# Altium PCB RelayBoardV1.3.PcbDoc
Units mil, origin at the board's own origin, x right, y up, seen from the top; angles counter-clockwise.
Board outline 3700.79 x 5244.09 mil, 2 copper layers (Top Layer, Bottom Layer); 36 components, 39 nets, 112 pads, 1912 vias.
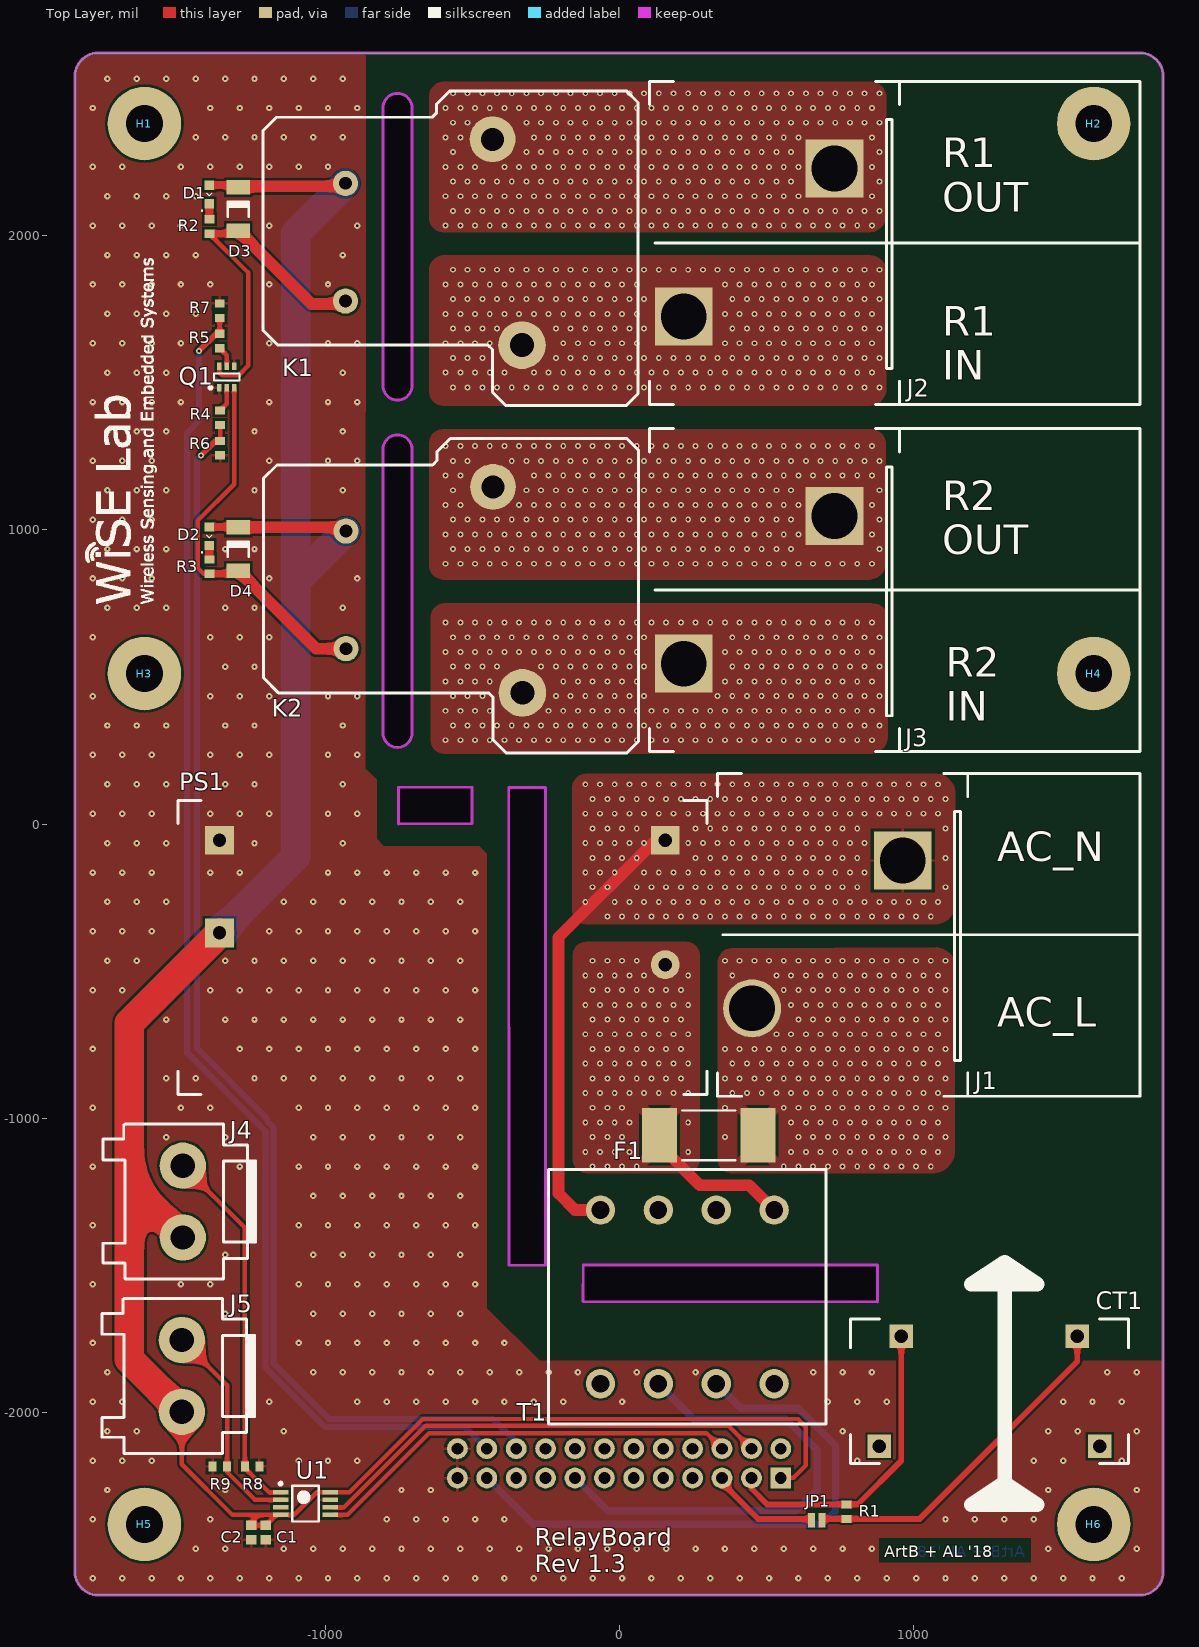
[diagram p0: Top Layer view]
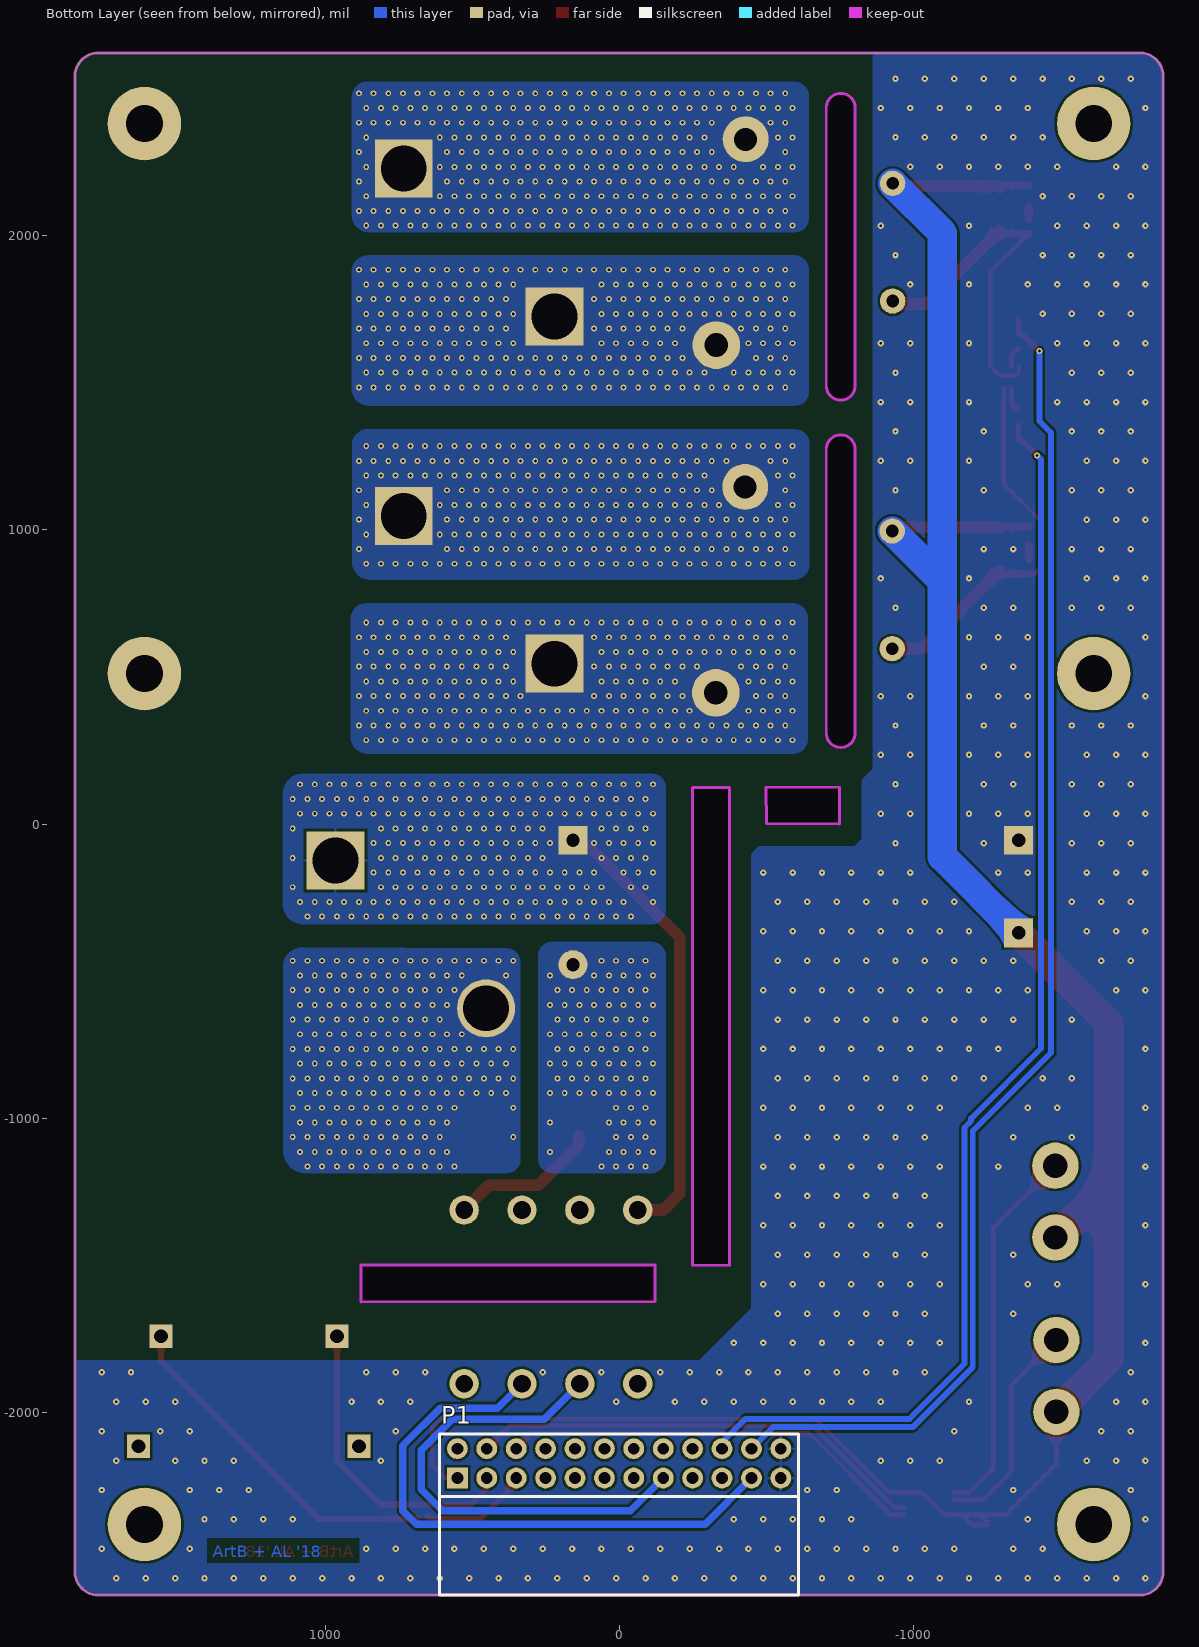
[diagram p1: Bottom Layer view, seen from below]

## Layer stack, top to bottom
Top Solder: solder mask 0.4, Solder Resist, Dk 3.5
Top Layer: signal copper 1.4
Dielectric 1: dielectric 12.6, FR-4, Dk 4.8
Bottom Layer: signal copper 1.4
Bottom Solder: solder mask 0.4, Solder Resist, Dk 3.5

## Board outline
-688.98,2622.05 688.98,2622.05 1771.65,2622.05 cw(c1771.65,2543.31) 1850.39,2543.31 1850.39,-2543.31 cw(c1771.65,-2543.31) 1771.65,-2622.05 -1771.65,-2622.05 cw(c-1771.65,-2543.31) -1850.39,-2543.31 -1850.39,2543.31 cw(c-1771.65,2543.31) -1771.65,2622.05
cut-out: -802.89,1490.75 -802.89,2435.63 cw(c-753.68,2435.63) -753.67,2484.85 cw(c-753.67,2435.63) -704.46,2435.63 -704.46,1490.75 cw(c-753.67,1490.75) -753.67,1441.54 cw(c-753.67,1490.75)
cut-out: -753.67,1323.43 ccw(c-753.67,1274.22) -802.89,1274.22 -802.89,309.65 ccw(c-753.67,309.65) -753.67,260.44 ccw(c-753.67,309.65) -704.46,309.65 -704.46,1274.22 ccw(c-753.67,1274.22)
cut-out: -121.88,-1500.54 -122.69,-1624.07 878.12,-1624.91 878.09,-1499.93
cut-out: -250.13,124.57 -375.34,124.31 -374.93,-1500.69 -249.98,-1500.69
cut-out: -500,125 -750,125 -750,0 -500.6,1.18

## Design rules (kind name [scope] priority, off if disabled: settings)
Clearance "Clearance - Ignore Keepout" [IsKeepOut] p1: gap=0 ignorepadtopadclearanceinfootprint=FALSE
Clearance [All] p2: gap=8 ignorepadtopadclearanceinfootprint=FALSE
ComponentClearance "Ignore Enclosure Part" [InComponent('H1')] p1: gap=0 collisioncheckmode=3 verticalgap=0 showdistances=FALSE
HoleSize [All] p1: absolutevalues=TRUE maxlimit=200 minlimit=8 maxpercent=80.000 minpercent=20.000
HoleToHoleClearance [All] p1: gap=12 allowstackedmicrovias=TRUE
MinimumSolderMaskSliver MinimumSolderMaskSliver_jumpers [HasFootprint('PAD-JUMPER-2-NO_NO_SILK')] p1: minsoldermaskwidth=2
MinimumSolderMaskSliver [All] p2: minsoldermaskwidth=4
PolygonConnect PolygonConnect_Vias [IsStitchingVia] p1: connectstyle=Direct reliefconductorwidth=10 reliefentries=4 polygonreliefangle="90 Angle" airgapwidth=10
PolygonConnect PolygonConnect_PS1 [HasFootprint('IRM-10-5')] p2: connectstyle=Direct reliefconductorwidth=40 reliefentries=4 polygonreliefangle="45 Angle" airgapwidth=10
PolygonConnect PolygonConnect_fUSE [HasFootprint('FUSE M10742X40L Schurter UMK 250 Series')] p3: connectstyle=Relief reliefconductorwidth=40 reliefentries=4 polygonreliefangle="45 Angle" airgapwidth=10
PolygonConnect PolygonConnect_HV [InNet('NEtF1_1') OR InNet('NetF1_2') OR InNet('NetJ1_2')  OR InNet('NetJ3_1')  OR InNet('NetJ3_2')  OR InNet('NetJ2_1')   OR InNet('NetJ2_2')] p4: connectstyle=Direct reliefconductorwidth=10 reliefentries=4 polygonreliefangle="90 Angle" airgapwidth=10
PolygonConnect [All] p5: connectstyle=Relief reliefconductorwidth=10 reliefentries=4 polygonreliefangle="90 Angle" airgapwidth=10
RoomDefinition RelayBoard [InComponentClass('RelayBoard')] p1: confinementstyle=ConfineIn formatcopy=TRUE lockcomponents=FALSE outline -2890,-4265 -890,-4265 -890,-3265 -2890,-3265
RoutingVias [All] p1: holewidth=28 width=50 viastyle="Through Hole" minholewidth=10 minwidth=20 maxholewidth=28 maxwidth=50
SilkToSilkClearance [All] p1: silktosilkclearance=8
SilkToSolderMaskClearance [IsPad] p1: minsilkscreentomaskgap=2 clearancetoexposedcopper=TRUE
SolderMaskExpansion [All] p1: expansion=4
Width [All] p1: maxlimit=500 minlimit=8 preferedwidth=25
24 further rules are at their usual default settings.

## Classes and differential pairs
polygon class PolygonClass_1: NETJ2_2_L01_P032
polygon class PolygonClass_2: NETJ2_2_L01_P032 NETJ2_2_L02_P060

## Components (designator, comment, footprint, x,y, rotation, side; value= is the part's Value field where it differs from the comment)
C1 "4.7uF" "CAPC1608X09L - CAP0603" -1201.5,-2409.81 r90 top
C2 "0.1uF" "CAPC1608X09L - CAP0603" -1250.75,-2409.81 r90 top
CT1 "Current Transformer" CT-CR8348 959.57,-1742.01 r0 top locked
D1 "Led Red" "LED-0603 .7MM TALL" -1393.44,2141.11 r90 top
D2 "Led Red" "LED-0603 .7MM TALL" -1393.44,978.94 r90 top
D3 "Diode" "SOD-80  MiniMELF" -1295.01,2091.14 r270 top
D4 "Diode" "SOD-80  MiniMELF" -1295.01,934.65 r270 top
F1 "Fuse 500mA" "FUSE M10742X40L Schurter UMK 250 Series" 304.7,-1058.69 r180 top
H1 "1/8in Hole by 1/4in Ring Fastener" "1/8in Fastener Hole"#1 -1614.17,2381.89 r0 top
H2 "1/8in Hole by 1/4in Ring Fastener" "1/8in Fastener Hole"#1 1614.17,2381.89 r0 top
H3 "1/8in Hole by 1/4in Ring Fastener" "1/8in Fastener Hole"#2 -1415.44,819.2 r0 top
H4 "1/8in Hole by 1/4in Ring Fastener" "1/8in Fastener Hole"#3 1409.91,829.91 r0 top
H5 "1/8in Hole by 1/4in Ring Fastener" "1/8in Fastener Hole"#4 -193.77,-1148.49 r0 top
H6 "1/8in Hole by 1/4in Ring Fastener" "1/8in Fastener Hole"#1 1614.17,-2381.89 r0 top
J1 "High Voltage Connector" "2POS Barrier Block Terminal"#1 452.22,-626.82 r90 top locked
J2 "High Voltage Connector" "2POS Barrier Block Terminal"#2 220.03,1726.34 r90 top locked
J3 "High Voltage Connector" "2POS Barrier Block Terminal"#2 220.03,545.23 r90 top locked
J4 "Thrmistor Connector" "2POS JST B02P-VL" -1483.78,-1284.13 r270 top locked
J5 "Thrmistor Connector" "2POS JST B02P-VL" -1487.04,-1876.99 r270 top locked
JP1 "JUMPER-PAD-2-NO" PAD-JUMPER-2-NO_NO_SILK 672.2,-2367.61 r0 top
K1 "Power Relay" T9AS1D12-5 -655.45,1953.55 r270 top locked
K2 "Power Relay" T9AS1D12-5 -653.87,771.26 r270 top locked
P1 "0.1\" Pitch, 2 Row, 24 Pos, Female, Right-Angle" "0.1 INCH 2 ROW 24 POS FEMALE RIGHT-ANGLE HEADER SULLINS" 0,-2174.41 r180 bottom locked
PS1 "AC/DC Power Supply" IRM-10-5 298.68,-919.49 r180 top
Q1 "NPN MOSFET" "SC-70-6  (SOT-363)" -1334.38,1520.28 r90 top
R1 "VAL?" "RESC1608X06L - RES0603" 773.45,-2338.6 r90 top
R2 "150" "RESC1608X06L - RES0603" -1393.44,2032.09 r90 top
R3 "150" "RESC1608X06L - RES0603" -1393.44,875.59 r90 top
R4 "1K" "RESC1608X06L - RES0603" -1357.09,1381.89 r90 top
R5 "1K" "RESC1608X06L - RES0603" -1358.13,1642.65 r270 top
R6 "10K" "RESC1608X06L - RES0603" -1357.09,1278.54 r90 top
R7 "10K" "RESC1608X06L - RES0603" -1358.13,1746 r270 top
R8 "10K" "RESC1608X06L - RES0603" -1248.06,-2184.7 r180 top
R9 "10K" "RESC1608X06L - RES0603" -1357.95,-2185.1 r0 top
T1 "SPK00304" SPK003 231.92,-1608.12 r180 top
U1 "ADC" "8L UMAX/USOP TSOP65P490X110-8L" -1066.65,-2311.17 r0 top

## Footprints (in the part's own frame and the unit in brackets; to place one, negate y for a bottom-side part, rotate by r counter-clockwise, add the part's x,y. Pads: shape width x height; smd on the part's side, far side on the other; paste and mask are expansions set on the pad)
"0.1 INCH 2 ROW 24 POS FEMALE RIGHT-ANGLE HEADER SULLINS" [mm] "Sullins 0.1\" Dual row 24 position female right-angle header"
  rect 1.8x1.8 hole 1.02: 1(-13.97,-1.27)
  round 1.8 hole 1.02: 2(-13.97,1.27) 3(-11.43,-1.27) 4(-11.43,1.27) 5(-8.89,-1.27) 6(-8.89,1.27) 7(-6.35,-1.27) 8(-6.35,1.27) 9(-3.81,-1.27) 10(-3.81,1.27) 11(-1.27,-1.27) 12(-1.27,1.27) 13(1.27,-1.27) 14(1.27,1.27) 15(3.81,-1.27) 16(3.81,1.27) 17(6.35,-1.27) 18(6.35,1.27) 19(8.89,-1.27) 20(8.89,1.27) 21(11.43,-1.27) 22(11.43,1.27) 23(13.97,-1.27) 24(13.97,1.27)
  silkscreen extent -15.5,-11.37 15.5,2.54, body extent -15.49,-11.34 15.49,1.5, height 5.08
"1/8in Fastener Hole"#1 [mil]
  round 250 hole 125: 1(0,0)
"1/8in Fastener Hole"#2 [mil]
  round 250 hole 125: 1(-198.73,-307.39)
"1/8in Fastener Hole"#3 [mil]
  round 250 hole 125: 1(204.27,-318.1)
"1/8in Fastener Hole"#4 [mil]
  round 250 hole 125: 1(-1420.4,-1233.4)
"2POS Barrier Block Terminal"#1 [mm] "CONN BARRIER STRIP 2CIRC 0.5\""
  round 5 hole 3.96: 1(0,0)
  rect 5x5 hole 3.96: 2(12.766,-13.018)
  silkscreen extent -7.6,-18.63 20.3,2.97, body extent -7.64,-18.62 20.3,2.97, height 22.61
"2POS Barrier Block Terminal"#2 [mm] "CONN BARRIER STRIP 2CIRC 0.5\""
  rect 5x5 hole 3.96: 1(0,0) 2(12.766,-13.018)
  silkscreen extent -7.6,-18.63 20.3,2.97, body extent -7.64,-18.62 20.3,2.97, height 22.61
"2POS JST B02P-VL" [mm] "CONN HEADER 2POS VL SERIES TIN"
  round 4 hole 2.1: 1(-3.1,0) 2(3.1,0)
  silkscreen extent -6.7,-6.9 6.7,6.3, body extent -6.7,-6.9 6.7,6.3, height 16.4
"8L UMAX/USOP TSOP65P490X110-8L" [mm] "TSOP, 8-Leads, Body 3.00x3.00mm, Pitch 0.65mm, IPC High Density"
  rect 1.35x0.4 smd mask+0.051: 1(-2.15,0.975) 2(-2.15,0.325) 3(-2.15,-0.325) 4(-2.15,-0.975) 5(2.15,-0.975) 6(2.15,-0.325) 7(2.15,0.325) 8(2.15,0.975)
  silkscreen extent -2.27,-1.55 1.15,1.85, body extent -2.51,-1.55 2.52,1.55, height 1.09
"CAPC1608X09L - CAP0603" [mm] "Chip Capacitor, 2-Leads, Body 1.60x0.80mm, IPC High Density"
  rect 0.8x0.9 smd: 1(-0.625,0) 2(0.625,0)
  body extent -0.87,-0.48 0.87,0.48, height 0.9
CT-CR8348 [mm] "TRANSF CURRENT .27\" OPENING PCB CR8348-2000"
  rect 2x2 hole 1.2: 1(0,0) 2(15.2,0) ""(-1.9,-9.5) ""(17.15,-9.5)
  silkscreen extent -4.38,-11 19.62,1.5, body extent -4.37,-10.1 19.62,0.6, height 25
"FUSE M10742X40L Schurter UMK 250 Series" [mm] "Molded Capacitor, 2-Leads, Body 10.70x4.20mm, IPC High Density"
  rect 3x4.7 smd: 1(-4.25,0) 2(4.25,0)
  silkscreen extent -2.29,-2.15 2.29,2.15, body extent -5.65,-2.11 5.65,2.09, height 3.97
IRM-10-5 [mm] "AC/DC Power Modules 5V 2A 10W 85-264Vin Encap PS"
  round 2.5 hole 1.15: AC1(3.6,-11.2)
  rect 2.5x2.5 hole 1.15: AC2(3.6,-21.95) V+(42.1,-13.95) V-(42.1,-21.95)
  silkscreen extent 0,-25.4 45.7,0, body extent 0,-25.4 45.7,0, height 21.5
"LED-0603 .7MM TALL" [mm] "Chip Diode, 2-Leads, Body 1.60x0.80mm, IPC High Density"
  rect 0.8x0.8 smd: A(0.8,0) K(-0.8,0)
  silkscreen extent -1.45,-0.25 0.13,0.68, body extent -1.01,-0.54 1.01,0.53, height 0.6
PAD-JUMPER-2-NO_NO_SILK [mil]
  rect 25x50 smd: 1(-17.72,0) 2(17.72,0)
"RESC1608X06L - RES0603" [mm] "Chip Resistor, 2-Leads, Body 1.60x0.80mm, IPC High Density"
  rect 0.7x0.85 smd: 1(-0.625,0) 2(0.625,0)
  body extent -0.87,-0.48 0.87,0.48, height 0.55
"SC-70-6  (SOT-363)" [mm] "TSOP, 6-Leads, Body 2.00x1.25mm, Pitch 0.65mm, IPC High Density"
  rect 0.648x0.406 smd mask+0.051: 1(-0.919,0.65) 2(-0.919,0) 3(-0.919,-0.65) 4(0.919,-0.65) 5(0.919,0) 6(0.919,0.65)
  silkscreen extent -1.04,-1.1 0.3,1.53, body extent -1.05,-1.1 1.05,1.1, height 1
"SOD-80  MiniMELF" [mm] "MELF Diode, 2-Leads, Body 3.50x1.50mm, IPC High Density"
  rect 1.25x2 smd: 1(-1.875,0) 2(1.875,0)
  silkscreen extent -0.65,-0.9 0.65,0.9, body extent -1.75,-0.75 1.75,0.75, height 1.5
SPK003 [mm]
  round 2.54 hole 1.524: 1(-7.5,-7.5) 2(-2.5,-7.5) 3(2.5,-7.5) 4(7.5,-7.5) 5(-7.5,7.5) 6(-2.5,7.5) 7(2.5,7.5) 8(7.5,7.5)
  silkscreen extent -12,-11 12,11, body extent -12,-11 12,11, height 15
T9AS1D12-5 [mil] "RELAY GEN PURPOSE SPST 30A 5V"
  round 162 hole 81: 1(325,325)
  round 156 hole 78: 2(-375,225)
  round 86 hole 43: 3(175,-275) 4(-225,-275)
  silkscreen extent -540,-555 530,720, body extent -545,-555 535,725, height 806

## Part data
C1: library part "CAP0603 4.7uF 10% 6.3V X7R", "SMT 0603 Ceramic Capacitor", Supplier Part Number 1=1276-2087-1-ND, TempCoeff=X7R, Tolerance=10%, Voltage=6.3V, Supplier 1=Digi-Key
C2: library part "CAP0603 0.1uF 10% 25V X7R", "SMT 0603 Ceramic Capacitor", Supplier Part Number 1=311-1341-1-ND, TempCoeff=X7R, Tolerance=10%, Voltage=25V, Supplier 1=Digi-Key, Supplier 2=Digi-Key, Supplier Part Number 2=490-1524-1-ND
CT1: library part "CT CR8348-2000", "TRANSF CURRENT .27\" OPENING PCB 50A", Supplier Part Number 1=582-1010-ND, Supplier 1=Digi-Key, url=https://www.digikey.com/product-detail/en/cr-magnetics-inc/CR8348-2000/582-1010-ND/1045166
D1 D2: library part "LED0603 RED 20mA 250mcd", "LED RED CLEAR 0603 SMD 250 mcd", Supplier Part Number 1=732-4978-1-ND, Supplier 1=Digi-Key
D3 D4: library part "Diode LL4150GS18", "DIODE GEN 50V 600MA MINI MELF", Supplier Part Number 1=LL4150GS18GICT-ND, Supplier 1=Digi-Key
F1: library part FUSE-Schurter-3404.2463.22, "FUSE UMK 250 FUSE WITH HOLDER 500MA F", Supplier Part Number 1=486-3187-1-ND, Supplier 1=Digi-Key, url=https://www.digikey.com/product-detail/en/3404.2463.22/486-3187-1-ND/5225261?curr=usd&WT.z_cid=ref_octopart_dkc_buynow&site=us
H1 H2 H3 H4 H5 H6: library part "1/8in by 1/4in Fastner Hole"
J1 J2 J3: library part "2POS CONN BARRIER STRIP 2CIRC 0.5\" 45A 600V", "MOLEX  0386608802", Supplier Part Number 1=WM4395-ND, Supplier 1=Digi-Key, url=http://www.mouser.com/ProductDetail/Molex/38660-8802/?qs=sGAEpiMZZMsntO7gZZwOWBznzzIjRi3IH61qEmgvOKA%3d
J4 J5: library part "2POS Thermistor Connector B02P-VL", "JST B02P-VL CONN HEADER 2POS VL SERIES TIN", Supplier Part Number 1=455-2361-ND, Supplier 1=Digi-Key, url=https://www.digikey.com/products/en?mpart=B02P-VL&v=455
K1 K2: library part T9AS1D12-5, "Single-Pole Single-Throw Relay", Supplier Part Number 1=PB1014-ND, Part Number=T9AS1D12-5, Supplier 1=Digi-Key
P1: library part "0.1\" 2 row 24 position female right-angle header sullins", "Sullins 0.1\" 2 row 24 position female right-angle header", Supplier Part Number 1=S5526-ND, Pitch=2.54mm, Positions=24, Rows=2, Supplier 1=Digi-Key, Supplier 2=Digi-Key, Supplier Part Number 2=S5565-ND
PS1: library part IRM-10-5, "AC/DC Power Modules 5V 2A 10W 85-264Vin Encap PS", Supplier Part Number 1=70387823, Mouser Link=http://www.mouser.com/ProductDetail/Mean-Well/IRM-10-5/?qs=sGAEpiMZZMuWiaalG5TUgH52QN1%252bIKAVGLeN4i9HrWU2QI8q%2fOO4Cw%3d%3d, Supplier 1=Allied, Supplier 2=Mouser, Supplier Part Number 2="Anonymous Daily Limit Reached"
Q1: library part SI1922EDH-T1-GE3CT, "2N-CH NPN MOSFET 20V 1.3A SOT-363", Supplier Part Number 1=SI1922EDH-T1-GE3CT-ND, Supplier 1=Digi-Key
R1: library part RES0603, "SMT 0603 Ceramic Resistor"
R2 R3: library part "RES0603 150 1% 1/10W_1", "SMT 0603 Ceramic Resistor", Supplier Part Number 1=311-150HRCT-ND, Supplier 1=Digi-Key
R4 R5: library part "RES0603 1K 1% 1/10W", "SMT 0603 Ceramic Resistor", Power=1/10W, Supplier Part Number 1=311-1.00KHRCT-ND, Tolerance=1%, Supplier 1=Digi-Key, Supplier 2=Digi-Key, Supplier 3=Digi-Key, Supplier Part Number 2=P1.00KHCT-ND, Supplier Part Number 3=RMCF0603FG1K00CT-ND
R6 R7 R8 R9: library part "RES0603 10K 1% 1/10W", "SMT 0603 Ceramic Resistor", Power=1/10W, Supplier Part Number 1=311-10.0KHRCT-ND, Tolerance=1%, Supplier 1=Digi-Key, Supplier 2=Digi-Key, Supplier 3=Digi-Key, Supplier Part Number 2=RMCF0603FT10K0CT-ND, Supplier Part Number 3=P10.0KHCT-ND
T1: "Standard PCB-Transformers"
U1: library part MAX11612EUA+, "IC ADC I2C/SRL 12BIT 4CH 8UMAX", Supplier Part Number 1=MAX11612EUA+-ND, Supplier 1=Digi-Key, url=https://www.digikey.com/product-detail/en/maxim-integrated/MAX11612EUA-/MAX11612EUA--ND/2061925

## Via types
v1: diameter 20, hole 10, Top Layer to Bottom Layer, tented both sides, 1465 vias
v2: diameter 22, hole 8, Top Layer to Bottom Layer, tented both sides, 447 vias

## Nets (pads, with @x,y where several pads share a name; then routed paths per layer and width w, separated by ;. In a path a pad name is that pad's centre, name@x,y a point inside that pad or via, vN(x,y) a via of type N, cw(c..) or ccw(c..) an arc to the next point about the centre after c; other vN are vias at no path point)
3.3V: P1.2
5V: C1.2 C2.2 D1.A D2.A D3.1 D4.1 J4.2 J5.2 K1.4 K2.4 P1.1 PS1.V+ U1.4 U1.8 | length 8930.9
  Top Layer w10: D4.1@-1296.69,1010.66 -1296.98,1010.44 D4.1@-1277.3,1010.44
  Top Layer w15: J5.2 -1487.04,-2177.53 -1314.9,-2349.67 -1226.83,-2349.67 ; U1.4@-1151.3,-2349.67 -1138.75,-2349.67 -1138.75,-2349.45 -1104.93,-2349.45 -1028.38,-2272.9 U1.8@-969.46,-2272.9 ; U1.8 -917.09,-2272.79 -667.78,-2023.48 608.74,-2023.48 635.02,-2049.76 635.02,-2181.49 593.43,-2223.08 551.33,-2223.08 P1.1 ; -1226.83,-2349.67 -1250.75,-2373.59 C2.2 C1.2 U1.4@-1165.96,-2349.67 ; -1226.83,-2349.67 U1.4@-1165.96,-2349.67 ; U1.4@-1165.96,-2349.67 -1151.41,-2349.67 U1.4 -1165.85,-2349.56 U1.4@-1165.96,-2349.67
  Top Layer w25: D2.A D4.1@-1296.98,1010.44 ; D1.A -1302.65,2172.6 D3.1
  Top Layer w40: D4.1 -1295.01,1008.98 -941.59,1008.98 K2.4 ; D3.1 -1291.27,2168.7 K1.4@-930.45,2168.7
  Top Layer w100: J5.2 -1665.3,-1820.77 -1665.3,-1224.66 ; J4.2 -1665.3,-1224.66 ; PS1.V+ -1665.3,-676.78 -1665.3,-1224.66
  Bottom Layer w100: PS1.V+ -1099.44,-110.91 -1099.44,834.71 ; K1.4 -1099.44,2009.56 -1099.44,834.71 ; K2.4 -1090.43,834.71 -1099.44,834.71
60HzAnt: P1.21 T1.6 | length 1984.1
  Bottom Layer w25: P1.21 -292.52,-2381.89 688.98,-2381.89 735.72,-2335.15 735.72,-2113.89 608.34,-1986.51 413.46,-1986.51 T1.6
60HzAntRef: P1.15 T1.7 | length 1666.7
  Bottom Layer w25: P1.15 -38.71,-2335.7 600.79,-2335.7 673.41,-2263.09 673.41,-2129.6 567.69,-2023.89 253.99,-2023.89 T1.7
AC_L: F1.2 PS1.AC1 T1.1 | length 514.1
  Top Layer w40: F1.2 137.37,-1091.09 274.53,-1228.24 442.6,-1228.24 T1.1
  other v1: -90,-1165 -40,-1165 10,-1165 60,-1165 -115,-1115 -65,-1115 -15,-1115 35,-1115 235,-1115 -90,-1065 -40,-1065 10,-1065 -115,-1015 -65,-1015 -15,-1015 35,-1015 235,-1015 -90,-965 -40,-965 10,-965 -115,-915 -65,-915 -15,-915 35,-915 85,-915 135,-915 185,-915 235,-915 -90,-865 -40,-865 10,-865 60,-865 110,-865 160,-865 210,-865 -115,-815 -65,-815 -15,-815 35,-815 85,-815 135,-815 185,-815 235,-815 -90,-765 -40,-765 10,-765 60,-765 110,-765 160,-765 210,-765 -115,-715 -65,-715 -15,-715 35,-715 85,-715 135,-715 185,-715 235,-715 -90,-665 -40,-665 10,-665 60,-665 110,-665 160,-665 210,-665 -115,-615 -65,-615 -15,-615 35,-615 85,-615 135,-615 185,-615 235,-615 -90,-565 -40,-565 10,-565 60,-565 110,-565 160,-565 210,-565 -115,-515 -65,-515 -15,-515 35,-515 85,-515 235,-515 -90,-465 -40,-465 10,-465 60,-465
AC_N: J1.2 PS1.AC2 T1.4 | length 1536.8
  Top Layer w40: T1.4 -149.58,-1312.84 -206.14,-1256.28 -206.14,-385.6 124.14,-55.32 PS1.AC2
  other v1: -40,-315 10,-315 60,-315 110,-315 160,-315 210,-315 260,-315 310,-315 360,-315 410,-315 460,-315 510,-315 560,-315 610,-315 660,-315 710,-315 760,-315 810,-315 860,-315 910,-315 960,-315 1010,-315 1060,-315 -115,-265 -15,-265 35,-265 85,-265 135,-265 185,-265 235,-265 285,-265 335,-265 385,-265 435,-265 485,-265 535,-265 585,-265 635,-265 685,-265 735,-265 785,-265 835,-265 885,-265 935,-265 985,-265 1035,-265 1085,-265 -90,-215 -40,-215 60,-215 110,-215 160,-215 210,-215 260,-215 310,-215 360,-215 410,-215 460,-215 510,-215 560,-215 610,-215 660,-215 710,-215 760,-215 810,-215 1110,-215 -115,-165 -65,-165 -15,-165 85,-165 135,-165 185,-165 235,-165 285,-165 335,-165 385,-165 435,-165 485,-165 535,-165 585,-165 635,-165 685,-165 735,-165 785,-165 835,-165 -90,-115 -40,-115 10,-115 60,-115 260,-115 310,-115 360,-115 410,-115 460,-115 510,-115 560,-115 610,-115 660,-115 710,-115 760,-115 810,-115 1110,-115 -115,-65 -65,-65 -15,-65 35,-65 85,-65 235,-65 285,-65 335,-65 385,-65 435,-65 485,-65 535,-65 585,-65 635,-65 685,-65 735,-65 785,-65 835,-65 -90,-15 -40,-15 10,-15 60,-15 260,-15 310,-15 360,-15 410,-15 460,-15 510,-15 560,-15 610,-15 660,-15 710,-15 760,-15 810,-15 1110,-15 -115,35 -65,35 -15,35 35,35 85,35 135,35 185,35 235,35 285,35 335,35 385,35 435,35 485,35 535,35 585,35 635,35 685,35 735,35 785,35 835,35 885,35 935,35 985,35 1035,35 1085,35 -90,85 -40,85 10,85 60,85 110,85 160,85 210,85 260,85 310,85 360,85 410,85 460,85 510,85 560,85 610,85 660,85 710,85 760,85 810,85 860,85 910,85 960,85 1010,85 1060,85 1110,85 -115,135 -65,135 -15,135 35,135 85,135 135,135 185,135 235,135 285,135 335,135 385,135 435,135 485,135 535,135 585,135 635,135 685,135 735,135 785,135 835,135 885,135 935,135 985,135 1035,135 1085,135
AIN0: J4.1 R8.2 U1.1 | length 1284
  Top Layer w15: J4.1 -1272.66,-1373.21 R8.2 -1272.66,-2190.74 -1190.51,-2272.9 U1.1@-1138.75,-2272.9
AIN1: J5.1 R9.2 U1.2 | length 746.3
  Top Layer w15: J5.1 -1333.34,-1908.64 R9.2 -1333.34,-2203.77 -1238.62,-2298.49 U1.2@-1138.75,-2298.49
CT_N: JP1.1 P1.5 | length 375.5
  Top Layer w20: P1.5 350,-2240.57 473.3,-2363.87 643.2,-2363.87 JP1.1@653.86,-2353.21
CT_P: CT1.1 P1.3 R1.2 | length 1052.6
  Top Layer w20: P1.3 450,-2260.14 503.86,-2313.99 R1.2 811.04,-2313.99 959.57,-2165.46 CT1.1
GND: C1.1 C2.1 P1.23 P1.24 PS1.V- Q1.1 Q1.4 R6.1 R7.1 R8.1 R9.1 U1.7
  other v2: -1790,-2565 -1690,-2565 -1590,-2565 -1490,-2565 -1390,-2565 -1290,-2565 -1190,-2565 -1090,-2565 -990,-2565 -890,-2565 -790,-2565 -690,-2565 -590,-2565 -490,-2565 -390,-2565 -290,-2565 -190,-2565 -90,-2565 10,-2565 110,-2565 210,-2565 310,-2565 410,-2565 510,-2565 610,-2565 710,-2565 810,-2565 910,-2565 1010,-2565 1110,-2565 1210,-2565 1310,-2565 1410,-2565 1510,-2565 1610,-2565 1710,-2565 -1440,-2465 -1340,-2465 -1140,-2465 -1040,-2465 -940,-2465 -840,-2465 -740,-2465 -640,-2465 -540,-2465 -440,-2465 -340,-2465 -240,-2465 -140,-2465 -40,-2465 60,-2465 160,-2465 260,-2465 360,-2465 460,-2465 560,-2465 660,-2465 760,-2465 860,-2465 1460,-2465 1760,-2465 -1790,-2365 -1390,-2365 -790,-2365 -690,-2365 -590,-2365 -490,-2365 -390,-2365 1110,-2365 1210,-2365 1310,-2365 1410,-2365 -1740,-2265 -1340,-2265 -740,-2265 -640,-2265 1260,-2265 1360,-2265 1460,-2265 1760,-2265 -1790,-2165 -1690,-2165 -1590,-2165 -1090,-2165 -990,-2165 -890,-2165 810,-2165 1310,-2165 1410,-2165 1510,-2165 1710,-2165 -1740,-2065 -1640,-2065 -1140,-2065 760,-2065 1460,-2065 1560,-2065 1760,-2065 -1790,-1965 -1690,-1965 -1190,-1965 -890,-1965 -790,-1965 -690,-1965 -590,-1965 -490,-1965 -390,-1965 -290,-1965 -190,-1965 10,-1965 710,-1965 810,-1965 910,-1965 1510,-1965 1610,-1965 1710,-1965 -1740,-1865 -1040,-1865 -940,-1865 -840,-1865 -740,-1865 -640,-1865 -540,-1865 -440,-1865 -340,-1865 -240,-1865 -140,-1865 60,-1865 260,-1865 660,-1865 760,-1865 860,-1865 1660,-1865 1760,-1865 -1790,-1765 -1090,-1765 -990,-1765 -890,-1765 -790,-1765 -690,-1765 -590,-1765 -490,-1765 -390,-1765 -1340,-1665 -1040,-1665 -940,-1665 -840,-1665 -740,-1665 -640,-1665 -540,-1665 -1790,-1565 -1490,-1565 -1390,-1565 -1090,-1565 -990,-1565 -890,-1565 -790,-1565 -690,-1565 -590,-1565 -490,-1565 -1340,-1465 -1040,-1465 -940,-1465 -840,-1465 -740,-1465 -640,-1465 -540,-1465 -1790,-1365 -1090,-1365 -990,-1365 -890,-1365 -790,-1365 -690,-1365 -590,-1365 -490,-1365 -1040,-1265 -940,-1265 -840,-1265 -740,-1265 -640,-1265 -540,-1265 -1790,-1165 -1290,-1165 -1090,-1165 -990,-1165 -890,-1165 -790,-1165 -690,-1165 -590,-1165 -490,-1165 -1540,-1065 -1340,-1065 -1040,-1065 -940,-1065 -840,-1065 -740,-1065 -640,-1065 -540,-1065 -1790,-965 -1490,-965 -1390,-965 -1090,-965 -990,-965 -890,-965 -790,-965 -690,-965 -590,-965 -490,-965 -1540,-865 -1440,-865 -1240,-865 -1140,-865 -1040,-865 -940,-865 -840,-865 -740,-865 -640,-865 -540,-865 -1790,-765 -1290,-765 -1190,-765 -1090,-765 -990,-765 -890,-765 -790,-765 -690,-765 -590,-765 -490,-765 -1540,-665 -1340,-665 -1240,-665 -1140,-665 -1040,-665 -940,-665 -840,-665 -740,-665 -640,-665 -540,-665 -1790,-565 -1690,-565 -1390,-565 -1290,-565 -1190,-565 -1090,-565 -990,-565 -890,-565 -790,-565 -690,-565 -590,-565 -490,-565 -1740,-465 -1640,-465 -1340,-465 -1240,-465 -1140,-465 -1040,-465 -940,-465 -840,-465 -740,-465 -640,-465 -540,-465 -1790,-365 -1690,-365 -1590,-365 -1190,-365 -1090,-365 -990,-365 -890,-365 -790,-365 -690,-365 -590,-365 -490,-365 -1740,-265 -1640,-265 -1540,-265 -1140,-265 -1040,-265 -940,-265 -840,-265 -740,-265 -640,-265 -540,-265 -1790,-165 -1690,-165 -1590,-165 -1390,-165 -1290,-165 -990,-165 -890,-165 -790,-165 -690,-165 -590,-165 -490,-165 -1740,-65 -1640,-65 -1540,-65 -1240,-65 -940,-65 -1790,35 -1690,35 -1590,35 -1390,35 -1290,35 -1190,35 -990,35 -890,35 -1740,135 -1640,135 -1540,135 -1340,135 -1240,135 -940,135 -1790,235 -1690,235 -1590,235 -1390,235 -1290,235 -1190,235 -990,235 -890,235 -1740,335 -1640,335 -1540,335 -1340,335 -1240,335 -940,335 -1790,435 -1390,435 -1290,435 -1190,435 -990,435 -890,435 -1340,535 -1240,535 -1790,635 -1390,635 -1290,635 -1190,635 -1740,735 -1640,735 -1540,735 -1340,735 -1240,735 -940,735 -1790,835 -1690,835 -1590,835 -1190,835 -890,835 -1740,935 -1640,935 -1540,935 -1340,935 -1240,935 -1790,1035 -1690,1035 -1590,1035 -1740,1135 -1640,1135 -1540,1135 -1240,1135 -940,1135 -1790,1235 -1690,1235 -1590,1235 -1190,1235 -990,1235 -890,1235 -1740,1335 -1640,1335 -1540,1335 -1240,1335 -940,1335 -1790,1435 -1690,1435 -1590,1435 -1490,1435 -1190,1435 -990,1435 -890,1435 -1740,1535 -1640,1535 -1540,1535 -940,1535 -1790,1635 -1690,1635 -1590,1635 -1490,1635 -1190,1635 -990,1635 -890,1635 -1740,1735 -1640,1735 -1540,1735 -1440,1735 -1790,1835 -1690,1835 -1590,1835 -1490,1835 -1390,1835 -1190,1835 -990,1835 -1740,1935 -1640,1935 -1540,1935 -1440,1935 -940,1935 -1790,2035 -1690,2035 -1590,2035 -1490,2035 -1190,2035 -890,2035 -1740,2135 -1640,2135 -1540,2135 -1440,2135 -1790,2235 -1690,2235 -1490,2235 -1390,2235 -1290,2235 -1190,2235 -1090,2235 -990,2235 -1440,2335 -1340,2335 -1240,2335 -1140,2335 -1040,2335 -940,2335 -1790,2435 -1390,2435 -1290,2435 -1190,2435 -1090,2435 -990,2435 -890,2435 -1740,2535 -1640,2535 -1540,2535 -1440,2535 -1340,2535 -1240,2535 -1140,2535 -1040,2535 -940,2535
GPIO1: P1.8
GPIO2: P1.10
GPIO3: P1.12
GPIO4: P1.14
GPIO5: P1.16
GPIO6: P1.18
GPIO7: P1.20 R4.1 R6.2 | length 4298.9
  Top Layer w15: R6.2@-1372.02,1303.15 R6.2 R4.1
  Top Layer w20: v1(-1421.72,1253.46) R6.2@-1372.02,1303.15
  Bottom Layer w20: v1(-1421.72,1253.46) -1435.1,1240.07 -1435.1,-763.57 -1196.76,-1001.91 -1196.76,-1010.54 -1174.9,-1032.4 -1174.9,-1835.57 -987.31,-2023.16 -429.65,-2023.16 -350,-2102.81 P1.20
GPIO8: P1.22 R5.1 R7.2 | length 4599.5
  Top Layer w15: R5.1 R7.2
  Top Layer w20: v1(-1429.25,1608.31) -1370.3,1667.26 R5.1
  Bottom Layer w20: v1(-1429.25,1608.31) -1429.25,1370.61 -1468.93,1330.93 -1468.93,-777.96 -1202.9,-1044 -1202.9,-1847.17 -998.91,-2051.16 -523.24,-2051.16 P1.22
I2C_SCL: P1.6 U1.5 | length 1456.6
  Top Layer w15: U1.5@-969.46,-2349.67 -969.25,-2349.45 -923.71,-2349.45 -645.74,-2071.48 297.07,-2071.48 P1.6
I2C_SDA: P1.4 U1.6 | length 1566.9
  Top Layer w15: U1.6@-969.46,-2324.08 -969.46,-2323.86 -935.64,-2323.86 -658.25,-2046.48 372.07,-2046.48 P1.4
Leak_N: P1.13
Leak_P: P1.11
NetCT1_2: CT1.2 JP1.2 R1.1 | length 1177.7
  Top Layer w10: JP1.2@689.3,-2353.21 JP1.2@690.3,-2353.33
  Top Layer w20: JP1.2@689.21,-2362.48 689.94,-2363.21 R1.1 1022.61,-2363.21 1557.99,-1827.82 CT1.2
NetD1_K: D1.K R2.2 | length 42.3
  Top Layer w25: R2.2 D1.K@-1393.44,2099.02
NetD2_K: D2.K R3.2 | length 47.2
  Top Layer w25: R3.2 D2.K
NetD3_2: D3.2 K1.3 Q1.6 R2.1 | length 1209.8
  Top Layer w15: R2.1 -1261.7,1875.75 -1261.7,1558.05 -1293.55,1526.2 -1349.62,1526.2 -1359.88,1536.45 -1359.88,1556.46 Q1.6
  Top Layer w25: R2.1 -1304.86,2007.48 D3.2
  Top Layer w40: D3.2 -1046.39,1768.7 K1.3@-930.45,1768.7
NetD4_2: D4.2 K2.3 Q1.3 R3.1 | length 1290.5
  Top Layer w10: D4.2@-1304.86,850.99 D4.2
  Top Layer w15: R3.1 -1413.12,850.99 -1432.81,870.67 -1432.81,1031.85 -1308.79,1155.87 Q1.3
  Top Layer w25: R3.1 D4.2@-1304.86,850.99
  Top Layer w40: D4.2 -1030.45,596.26 K2.3
NetF1_1: F1.1 J1.1 | length 55.7
  Top Layer w10: J1.1 J1.1@491.59,-666.19
  other v1: 560,-1165 610,-1165 660,-1165 710,-1165 760,-1165 810,-1165 860,-1165 910,-1165 960,-1165 1010,-1165 1060,-1165 585,-1115 635,-1115 685,-1115 735,-1115 785,-1115 835,-1115 885,-1115 935,-1115 985,-1115 1035,-1115 1085,-1115 360,-1065 610,-1065 660,-1065 710,-1065 760,-1065 810,-1065 860,-1065 910,-1065 960,-1065 1010,-1065 1060,-1065 1110,-1065 585,-1015 635,-1015 685,-1015 735,-1015 785,-1015 835,-1015 885,-1015 935,-1015 985,-1015 1035,-1015 1085,-1015 360,-965 560,-965 610,-965 660,-965 710,-965 760,-965 810,-965 860,-965 910,-965 960,-965 1010,-965 1060,-965 1110,-965 385,-915 435,-915 485,-915 535,-915 585,-915 635,-915 685,-915 735,-915 785,-915 835,-915 885,-915 935,-915 985,-915 1035,-915 1085,-915 360,-865 410,-865 460,-865 510,-865 560,-865 610,-865 660,-865 710,-865 760,-865 810,-865 860,-865 910,-865 960,-865 1010,-865 1060,-865 1110,-865 385,-815 435,-815 485,-815 535,-815 585,-815 635,-815 685,-815 735,-815 785,-815 835,-815 885,-815 935,-815 985,-815 1035,-815 1085,-815 360,-765 410,-765 460,-765 510,-765 560,-765 610,-765 660,-765 710,-765 760,-765 810,-765 860,-765 910,-765 960,-765 1010,-765 1060,-765 1110,-765 535,-715 585,-715 635,-715 685,-715 735,-715 785,-715 835,-715 885,-715 935,-715 985,-715 1035,-715 1085,-715 610,-665 660,-665 710,-665 760,-665 810,-665 860,-665 910,-665 960,-665 1010,-665 1060,-665 1110,-665 585,-615 635,-615 685,-615 735,-615 785,-615 835,-615 885,-615 935,-615 985,-615 1035,-615 1085,-615 560,-565 610,-565 660,-565 710,-565 760,-565 810,-565 860,-565 910,-565 960,-565 1010,-565 1060,-565 1110,-565 385,-515 535,-515 585,-515 635,-515 685,-515 735,-515 785,-515 835,-515 885,-515 935,-515 985,-515 1035,-515 1085,-515 360,-465 410,-465 460,-465 510,-465 560,-465 610,-465 660,-465 710,-465 760,-465 810,-465 860,-465 910,-465 960,-465 1010,-465 1060,-465 1110,-465
NetJ2_1: J2.1 K1.1
  other v1: -565,1485 -515,1485 -465,1485 -415,1485 -365,1485 -315,1485 -265,1485 -215,1485 -165,1485 -115,1485 -65,1485 -15,1485 35,1485 85,1485 135,1485 185,1485 235,1485 285,1485 335,1485 385,1485 435,1485 485,1485 535,1485 585,1485 635,1485 685,1485 735,1485 785,1485 835,1485 885,1485 -590,1535 -540,1535 -490,1535 -440,1535 -390,1535 -290,1535 -240,1535 -190,1535 -140,1535 -90,1535 -40,1535 10,1535 60,1535 110,1535 160,1535 210,1535 260,1535 310,1535 360,1535 410,1535 460,1535 510,1535 560,1535 610,1535 660,1535 710,1535 760,1535 810,1535 860,1535 -565,1585 -515,1585 -465,1585 -215,1585 -165,1585 -115,1585 -65,1585 -15,1585 35,1585 85,1585 135,1585 185,1585 235,1585 285,1585 335,1585 385,1585 435,1585 485,1585 535,1585 585,1585 635,1585 685,1585 735,1585 785,1585 835,1585 885,1585 -590,1635 -540,1635 -490,1635 -440,1635 -190,1635 -140,1635 -90,1635 -40,1635 10,1635 60,1635 360,1635 410,1635 460,1635 510,1635 560,1635 610,1635 660,1635 710,1635 760,1635 810,1635 860,1635 -565,1685 -515,1685 -465,1685 -415,1685 -215,1685 -165,1685 -115,1685 -65,1685 -15,1685 35,1685 85,1685 385,1685 435,1685 485,1685 535,1685 585,1685 635,1685 685,1685 735,1685 785,1685 835,1685 885,1685 -590,1735 -540,1735 -490,1735 -440,1735 -390,1735 -340,1735 -290,1735 -240,1735 -190,1735 -140,1735 -90,1735 -40,1735 10,1735 60,1735 360,1735 410,1735 460,1735 510,1735 560,1735 610,1735 660,1735 710,1735 760,1735 810,1735 860,1735 -565,1785 -515,1785 -465,1785 -415,1785 -365,1785 -315,1785 -265,1785 -215,1785 -165,1785 -115,1785 -65,1785 -15,1785 35,1785 85,1785 385,1785 435,1785 485,1785 535,1785 585,1785 635,1785 685,1785 735,1785 785,1785 835,1785 885,1785 -590,1835 -540,1835 -490,1835 -440,1835 -390,1835 -340,1835 -290,1835 -240,1835 -190,1835 -140,1835 -90,1835 -40,1835 10,1835 60,1835 360,1835 410,1835 460,1835 510,1835 560,1835 610,1835 660,1835 710,1835 760,1835 810,1835 860,1835 -565,1885 -515,1885 -465,1885 -415,1885 -365,1885 -315,1885 -265,1885 -215,1885 -165,1885 -115,1885 -65,1885 -15,1885 35,1885 85,1885 135,1885 185,1885 235,1885 285,1885 335,1885 385,1885 435,1885 485,1885 535,1885 585,1885 635,1885 685,1885 735,1885 785,1885 835,1885 885,1885
NetJ2_2: J2.2 K1.2
  other v1: -590,2035 -540,2035 -490,2035 -440,2035 -390,2035 -340,2035 -290,2035 -240,2035 -190,2035 -140,2035 -90,2035 -40,2035 10,2035 60,2035 110,2035 160,2035 210,2035 260,2035 310,2035 360,2035 410,2035 460,2035 510,2035 560,2035 610,2035 660,2035 710,2035 760,2035 810,2035 860,2035 -565,2085 -515,2085 -465,2085 -415,2085 -365,2085 -315,2085 -265,2085 -215,2085 -165,2085 -115,2085 -65,2085 -15,2085 35,2085 85,2085 135,2085 185,2085 235,2085 285,2085 335,2085 385,2085 435,2085 485,2085 535,2085 585,2085 635,2085 685,2085 735,2085 785,2085 835,2085 885,2085 -590,2135 -540,2135 -490,2135 -440,2135 -390,2135 -340,2135 -290,2135 -240,2135 -190,2135 -140,2135 -90,2135 -40,2135 10,2135 60,2135 110,2135 160,2135 210,2135 260,2135 310,2135 360,2135 410,2135 460,2135 510,2135 560,2135 610,2135 860,2135 -565,2185 -515,2185 -465,2185 -415,2185 -365,2185 -315,2185 -265,2185 -215,2185 -165,2185 -115,2185 -65,2185 -15,2185 35,2185 85,2185 135,2185 185,2185 235,2185 285,2185 335,2185 385,2185 435,2185 485,2185 535,2185 585,2185 885,2185 -590,2235 -540,2235 -490,2235 -390,2235 -340,2235 -290,2235 -240,2235 -190,2235 -140,2235 -90,2235 -40,2235 10,2235 60,2235 110,2235 160,2235 210,2235 260,2235 310,2235 360,2235 410,2235 460,2235 510,2235 560,2235 610,2235 860,2235 -565,2285 -315,2285 -265,2285 -215,2285 -165,2285 -115,2285 -65,2285 -15,2285 35,2285 85,2285 135,2285 185,2285 235,2285 285,2285 335,2285 385,2285 435,2285 485,2285 535,2285 585,2285 885,2285 -590,2335 -540,2335 -290,2335 -240,2335 -190,2335 -140,2335 -90,2335 -40,2335 10,2335 60,2335 110,2335 160,2335 210,2335 260,2335 310,2335 360,2335 410,2335 460,2335 510,2335 560,2335 610,2335 860,2335 -565,2385 -515,2385 -315,2385 -265,2385 -215,2385 -165,2385 -115,2385 -65,2385 -15,2385 35,2385 85,2385 135,2385 185,2385 235,2385 285,2385 335,2385 385,2385 435,2385 485,2385 535,2385 585,2385 635,2385 685,2385 735,2385 785,2385 835,2385 885,2385 -590,2435 -540,2435 -490,2435 -440,2435 -390,2435 -340,2435 -290,2435 -240,2435 -190,2435 -140,2435 -90,2435 -40,2435 10,2435 60,2435 110,2435 160,2435 210,2435 260,2435 310,2435 360,2435 410,2435 460,2435 510,2435 560,2435 610,2435 660,2435 710,2435 760,2435 810,2435 860,2435 -565,2485 -515,2485 -465,2485 -415,2485 -365,2485 -315,2485 -265,2485 -215,2485 -165,2485 -115,2485 -65,2485 -15,2485 35,2485 85,2485 135,2485 185,2485 235,2485 285,2485 335,2485 385,2485 435,2485 485,2485 535,2485 585,2485 635,2485 685,2485 735,2485 785,2485 835,2485 885,2485
NetJ3_1: J3.1 K2.1
  other v1: -590,285 -540,285 -490,285 -440,285 -390,285 -340,285 -290,285 -240,285 -190,285 -140,285 -90,285 -40,285 10,285 60,285 110,285 160,285 210,285 260,285 310,285 360,285 410,285 460,285 510,285 560,285 610,285 660,285 710,285 760,285 810,285 860,285 -565,335 -515,335 -465,335 -415,335 -365,335 -315,335 -265,335 -215,335 -165,335 -115,335 -65,335 -15,335 35,335 85,335 135,335 185,335 235,335 285,335 335,335 385,335 435,335 485,335 535,335 585,335 635,335 685,335 735,335 785,335 835,335 885,335 -590,385 -540,385 -490,385 -440,385 -240,385 -190,385 -140,385 -90,385 -40,385 10,385 60,385 110,385 160,385 210,385 260,385 310,385 360,385 410,385 460,385 510,385 560,385 610,385 660,385 710,385 760,385 810,385 860,385 -565,435 -515,435 -465,435 -215,435 -165,435 -115,435 -65,435 -15,435 35,435 85,435 335,435 385,435 435,435 485,435 535,435 585,435 635,435 685,435 735,435 785,435 835,435 885,435 -590,485 -540,485 -490,485 -440,485 -190,485 -140,485 -90,485 -40,485 10,485 60,485 360,485 410,485 460,485 510,485 560,485 610,485 660,485 710,485 760,485 810,485 860,485 -565,535 -515,535 -465,535 -415,535 -265,535 -215,535 -165,535 -115,535 -65,535 -15,535 35,535 85,535 385,535 435,535 485,535 535,535 585,535 635,535 685,535 735,535 785,535 835,535 885,535 -590,585 -540,585 -490,585 -440,585 -390,585 -340,585 -290,585 -240,585 -190,585 -140,585 -90,585 -40,585 10,585 60,585 360,585 410,585 460,585 510,585 560,585 610,585 660,585 710,585 760,585 810,585 860,585 -565,635 -515,635 -465,635 -415,635 -365,635 -315,635 -265,635 -215,635 -165,635 -115,635 -65,635 -15,635 35,635 85,635 385,635 435,635 485,635 535,635 585,635 635,635 685,635 735,635 785,635 835,635 885,635 -590,685 -540,685 -490,685 -440,685 -390,685 -340,685 -290,685 -240,685 -190,685 -140,685 -90,685 -40,685 10,685 60,685 110,685 160,685 210,685 260,685 310,685 360,685 410,685 460,685 510,685 560,685 610,685 660,685 710,685 760,685 810,685 860,685
NetJ3_2: J3.2 K2.2
  other v1: -590,885 -540,885 -490,885 -440,885 -390,885 -340,885 -290,885 -240,885 -190,885 -140,885 -90,885 -40,885 10,885 60,885 110,885 160,885 210,885 260,885 310,885 360,885 410,885 460,885 510,885 560,885 610,885 660,885 710,885 760,885 810,885 860,885 -565,935 -515,935 -465,935 -415,935 -365,935 -315,935 -265,935 -215,935 -165,935 -115,935 -65,935 -15,935 35,935 85,935 135,935 185,935 235,935 285,935 335,935 385,935 435,935 485,935 535,935 585,935 885,935 -590,985 -540,985 -490,985 -440,985 -390,985 -340,985 -290,985 -240,985 -190,985 -140,985 -90,985 -40,985 10,985 60,985 110,985 160,985 210,985 260,985 310,985 360,985 410,985 460,985 510,985 560,985 610,985 860,985 -565,1035 -515,1035 -465,1035 -415,1035 -365,1035 -315,1035 -265,1035 -215,1035 -165,1035 -115,1035 -65,1035 -15,1035 35,1035 85,1035 135,1035 185,1035 235,1035 285,1035 335,1035 385,1035 435,1035 485,1035 535,1035 585,1035 885,1035 -590,1085 -540,1085 -340,1085 -290,1085 -240,1085 -190,1085 -140,1085 -90,1085 -40,1085 10,1085 60,1085 110,1085 160,1085 210,1085 260,1085 310,1085 360,1085 410,1085 460,1085 510,1085 560,1085 610,1085 860,1085 -565,1135 -315,1135 -265,1135 -215,1135 -165,1135 -115,1135 -65,1135 -15,1135 35,1135 85,1135 135,1135 185,1135 235,1135 285,1135 335,1135 385,1135 435,1135 485,1135 535,1135 585,1135 885,1135 -590,1185 -540,1185 -290,1185 -240,1185 -190,1185 -140,1185 -90,1185 -40,1185 10,1185 60,1185 110,1185 160,1185 210,1185 260,1185 310,1185 360,1185 410,1185 460,1185 510,1185 560,1185 610,1185 660,1185 710,1185 760,1185 810,1185 860,1185 -565,1235 -515,1235 -365,1235 -315,1235 -265,1235 -215,1235 -165,1235 -115,1235 -65,1235 -15,1235 35,1235 85,1235 135,1235 185,1235 235,1235 285,1235 335,1235 385,1235 435,1235 485,1235 535,1235 585,1235 635,1235 685,1235 735,1235 785,1235 835,1235 885,1235 -590,1285 -540,1285 -490,1285 -440,1285 -390,1285 -340,1285 -290,1285 -240,1285 -190,1285 -140,1285 -90,1285 -40,1285 10,1285 60,1285 110,1285 160,1285 210,1285 260,1285 310,1285 360,1285 410,1285 460,1285 510,1285 560,1285 610,1285 660,1285 710,1285 760,1285 810,1285 860,1285
NetQ1_2: Q1.2 R4.2 | length 87
  Top Layer w15: R4.2 -1334.38,1429.21 Q1.2
NetQ1_5: Q1.5 R5.2 | length 71.4
  Top Layer w15: R5.2 -1334.38,1594.29 Q1.5
RFU1: P1.17
RFU2: P1.19
RS4855_A: P1.9
RS4855_B: P1.7
pads on no net: CT1. H1.1 H2.1 H3.1 H4.1 H5.1 H6.1 T1.2 T1.3 T1.5 T1.8 U1.3

## Polygon pours and split planes (outlines as drawn)
GND on Top Layer "GND_L01_P116" (solid, remove dead copper, pour order 116): -862.41,2621.67 -1771.68,2622.02 ccw(c-1771.72,2543.34) -1850.39,2543.34 -1850.39,-2543.01 ccw(c-1771.72,-2543.38) -1771.65,-2622.05 1794.02,-2618.86 ccw(c1771.6,-2543.34) 1850.38,-2543.32 1850.25,-1826.23 -270.13,-1826.07 -450.1,-1646.08 -450.04,-100.69 -474.95,-75.72 -800.52,-75.13 -824.96,-50.62 -824.73,149.98 -849.97,175.53 -862.82,188.43
NetF1_1 on Top Layer "NETF1_1_L01_P146" (solid, pour order 146): 378.48,-1187.21 1066.02,-1187.21 ccw(c1066.02,-1110.95) 1142.27,-1110.95 1142.27,-485.14 ccw(c1076.46,-485.14) 1076.45,-419.32 385.07,-421.75 ccw(c385.05,-470.94) 335.86,-470.96 335.86,-1137.99 ccw(c381.77,-1141.29)
AC_N on Top Layer "AC_N_L01_P138" (solid, pour order 138): -110.01,-340.6 1074.6,-340.6 ccw(c1074.6,-271.31) 1143.89,-271.31 1143.89,102.32 ccw(c1074.99,102.32) 1074.99,171.21 -110,171.21 ccw(c-110.02,122.02) -159.21,122 -159.21,-291.38 ccw(c-110.01,-291.39)
NetJ3_1 on Top Layer "NETJ3_1_L01_P130" (solid, pour order 130): -591.83,238.71 854.58,238.71 ccw(c854.58,297.18) 913.05,297.18 913.05,701.31 ccw(c859.21,696.68) 854.58,750.52 -591.83,750.52 ccw(c-591.84,701.32) -641.04,701.31 -641.04,287.92 ccw(c-591.83,287.92)
NetJ3_2 on Top Layer "NETJ3_2_L01_P126" (solid, pour order 126): -597.29,831.4 849.12,831.4 ccw(c849.12,889.87) 907.59,889.87 907.59,1294 ccw(c853.75,1289.37) 849.12,1343.21 -597.29,1343.21 ccw(c-597.3,1294.01) -646.5,1294 -646.5,880.61 ccw(c-597.29,880.6)
NetJ2_1 on Top Layer "NETJ2_1_L01_P122" (solid, pour order 122): -596.2,1421.9 850.21,1421.9 ccw(c850.21,1480.37) 908.68,1480.37 908.68,1884.5 ccw(c854.84,1879.87) 850.21,1933.71 -596.19,1933.71 ccw(c-596.21,1884.51) -645.41,1884.5 -645.41,1471.11 ccw(c-596.2,1471.11)
NetJ2_2 on Top Layer "NETJ2_2_L01_P107" (solid, pour order 107): -596.2,2012.4 850.21,2012.4 ccw(c850.21,2070.87) 908.68,2070.88 908.68,2475 ccw(c854.84,2470.37) 850.21,2524.22 -596.19,2524.22 ccw(c-596.21,2475.02) -645.41,2475 -645.41,2061.62 ccw(c-596.2,2061.61)
AC_L on Top Layer "AC_L_L01_P101" (solid, pour order 101): 225.85,-399.8 -108.8,-399.8 ccw(c-108.8,-449.02) -158.01,-449.02 -158.01,-1137.99 ccw(c-108.8,-1137.99) -108.8,-1187.21 225.85,-1187.21 ccw(c225.85,-1137.99) 275.06,-1137.99 275.06,-449.02 ccw(c225.85,-449.02)
GND on Bottom Layer "GND_L02_P118" (solid, pour order 118): -862.41,2621.67 -1771.68,2622.02 ccw(c-1771.72,2543.34) -1850.39,2543.34 -1850.39,-2543.01 ccw(c-1771.72,-2543.38) -1771.65,-2622.05 1794.02,-2618.86 ccw(c1771.6,-2543.34) 1850.38,-2543.32 1850.25,-1824.57 -272.31,-1823.9 -450.1,-1646.1 -450.04,-100.69 -474.95,-75.72 -800.52,-75.13 -824.96,-50.62 -824.73,149.98 -849.97,175.53 -862.82,188.43
NetF1_1 on Bottom Layer "NETF1_1_L02_P134" (solid, pour order 134): 378.48,-1187.21 1066.02,-1187.21 ccw(c1066.02,-1110.95) 1142.27,-1110.95 1142.27,-485.14 ccw(c1076.46,-485.14) 1076.45,-419.32 385.07,-421.75 ccw(c385.05,-470.94) 335.86,-470.96 335.86,-1137.99 ccw(c381.77,-1141.29)
AC_N on Bottom Layer "AC_N_L02_P144" (solid, pour order 144): -110.01,-340.6 1074.6,-340.6 ccw(c1074.6,-271.31) 1143.89,-271.31 1143.89,102.32 ccw(c1074.99,102.32) 1074.99,171.21 -110,171.21 ccw(c-110.02,122.02) -159.21,122 -159.21,-291.38 ccw(c-110.01,-291.39)
NetJ3_1 on Bottom Layer "NETJ3_1_L02_P132" (solid, pour order 132): -591.83,238.71 854.58,238.71 ccw(c854.58,297.18) 913.05,297.18 913.05,701.31 ccw(c859.21,696.68) 854.58,750.52 -591.83,750.52 ccw(c-591.84,701.32) -641.04,701.31 -641.04,287.92 ccw(c-591.83,287.92)
NetJ3_2 on Bottom Layer "NETJ3_2_L02_P128" (solid, pour order 128): -597.29,831.4 849.12,831.4 ccw(c849.12,889.87) 907.59,889.87 907.59,1294 ccw(c853.75,1289.37) 849.12,1343.21 -597.29,1343.21 ccw(c-597.3,1294.01) -646.5,1294 -646.5,880.61 ccw(c-597.29,880.6)
NetJ2_1 on Bottom Layer "NETJ2_1_L02_P124" (solid, pour order 124): -596.2,1421.9 850.21,1421.9 ccw(c850.21,1480.37) 908.68,1480.37 908.68,1884.5 ccw(c854.84,1879.87) 850.21,1933.71 -596.19,1933.71 ccw(c-596.21,1884.51) -645.41,1884.5 -645.41,1471.11 ccw(c-596.2,1471.11)
NetJ2_2 on Bottom Layer "NETJ2_2_L02_P120" (solid, pour order 120): -596.2,2012.4 850.21,2012.4 ccw(c850.21,2070.87) 908.68,2070.88 908.68,2475 ccw(c854.84,2470.37) 850.21,2524.22 -596.19,2524.22 ccw(c-596.21,2475.02) -645.41,2475 -645.41,2061.62 ccw(c-596.2,2061.61)
AC_L on Bottom Layer "AC_L_L02_P110" (solid, pour order 110): 225.85,-399.8 -108.8,-399.8 ccw(c-108.8,-449.02) -158.01,-449.02 -158.01,-1137.99 ccw(c-108.8,-1137.99) -108.8,-1187.21 225.85,-1187.21 ccw(c225.85,-1137.99) 275.06,-1137.99 275.06,-449.02 ccw(c225.85,-449.02)

## Keep-outs
Keep-Out Layer:
  lines w10: -1850.39,-2543.31 ccw(c-1771.65,-2543.31) -1771.65,-2622.05 1771.65,-2622.05 ccw(c1771.65,-2543.31) 1850.39,-2543.31 1850.39,2543.31 ccw(c1771.65,2543.31) 1771.65,2622.05 688.98,2622.05 -688.98,2622.05 -1771.65,2622.05 ccw(c-1771.65,2543.31) -1850.39,2543.31 -1850.39,-2543.31 ; -802.89,309.65 ccw(c-753.67,309.65) -753.67,260.44 ccw(c-753.67,309.65) -704.46,309.65 -704.46,1274.22 ccw(c-753.67,1274.22) -753.67,1323.43 ccw(c-753.67,1274.22) -802.89,1274.22 -802.89,309.65 ; -802.89,1490.75 ccw(c-753.67,1490.75) -753.67,1441.54 ccw(c-753.67,1490.75) -704.46,1490.75 -704.46,2435.63 ccw(c-753.67,2435.63) -753.67,2484.85 ccw(c-753.68,2435.63) -802.89,2435.63 -802.89,1490.75 ; -750,0 -500.6,1.18 -500,125 -750,125 -750,0 ; -375.34,124.31 -374.93,-1500.69 -249.98,-1500.69 -250.13,124.57 -375.34,124.31 ; -122.69,-1624.07 878.12,-1624.91 878.09,-1499.93 -121.88,-1500.54 -122.69,-1624.07

## Other copper
Top Layer:
  text "ArtB + AL '18" at 902.38,-2493.4 h40
Bottom Layer:
  text "ArtB + AL '18" at 1382,-2494.2 h40

## Silkscreen, mask and mechanical layers (free items; w line width, h text height)
Top Overlay:
  drawing of 3143 lines, arcs and shapes, not listed
  text "R1 / OUT" at 1099.59,2082.96 h100
  text "R1 / IN" at 1099.59,1510.94 h100
  text "R2 / OUT" at 1099.59,917.11 h100
  text "R2 / IN" at 1111.22,350.59 h100
  text "AC_N" at 1286.28,-126.52 h100
  text "AC_L" at 1286.28,-689.08 h100
  text "ArtB + AL '18" at 902.09,-2493.97 h40
  text "RelayBoard / Rev 1.3" at -286.88,-2545.11 h60

## Text inside footprints (layer, text, board x,y; h text height)
P1: Mechanical 1 "11.37MM / FROM / CENTER" at -88,-2560.15 h39.37 r270